# Altium PCB MainBoard.PcbDoc
Units mm, origin at the board's own origin, x right, y up, seen from the top; angles counter-clockwise.
Board outline 63.25 x 28.07 mm, 2 copper layers (Top Layer, Bottom Layer); 24 components, 30 nets, 104 pads, 0 vias.
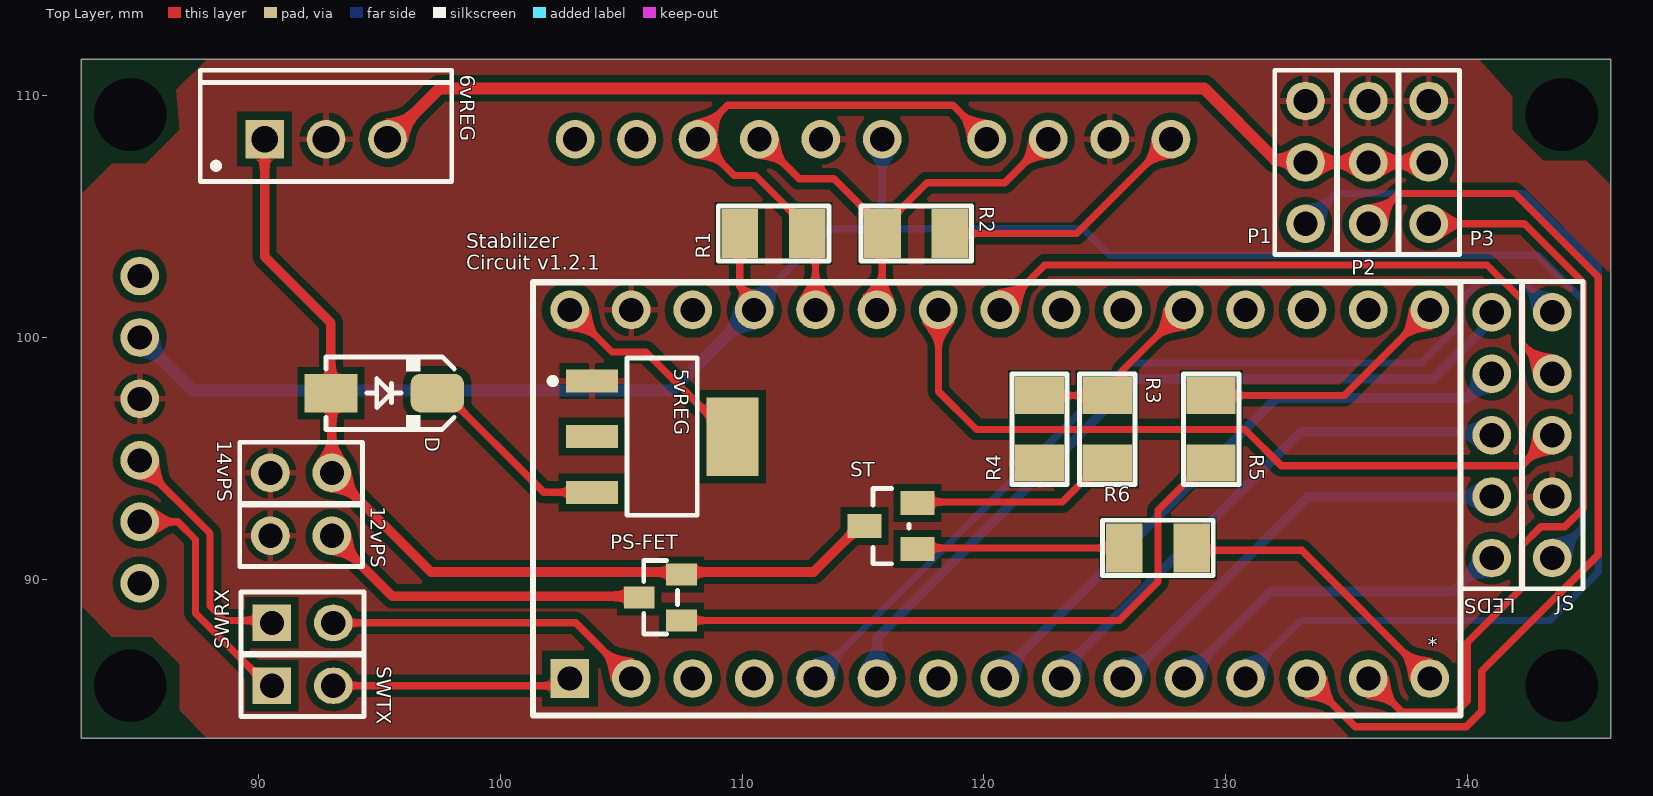
[diagram p0: Top Layer view]
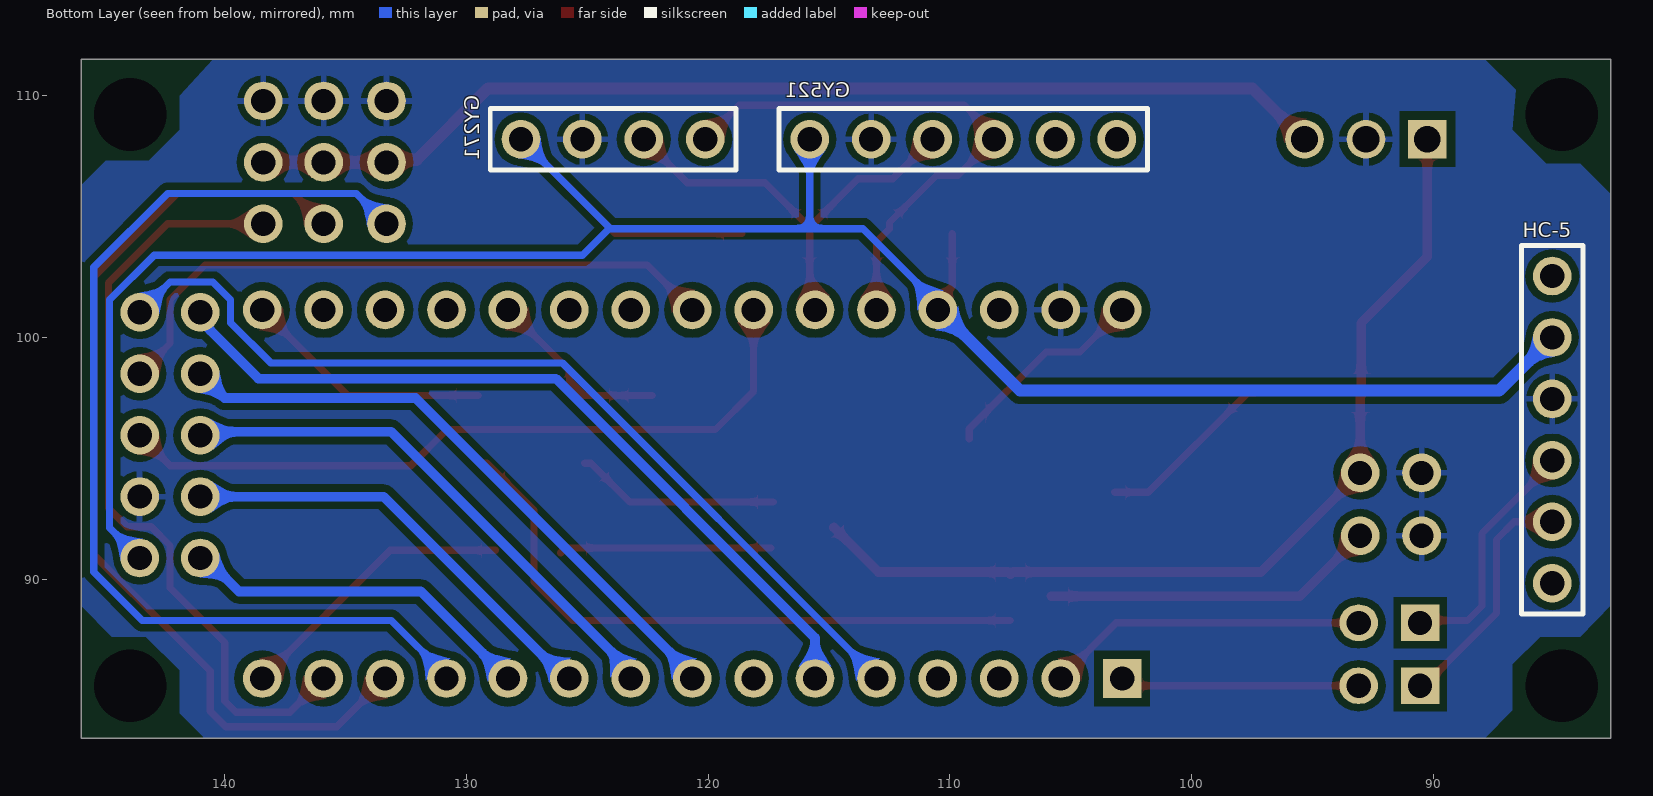
[diagram p1: Bottom Layer view, seen from below]

## Layer stack, top to bottom
Top Solder: solder mask 0.0102, Solder Resist, Dk 3.5
Top Layer: signal copper 0.0356
Dielectric 1: dielectric 0.32, FR-4, Dk 4.8
Bottom Layer: signal copper 0.0356
Bottom Solder: solder mask 0.0102, Solder Resist, Dk 3.5

## Board outline
82.677,83.439 145.923,83.439 145.923,111.506 82.677,111.506

## Design rules (kind name [scope] priority, off if disabled: settings)
Clearance [All] p1: gap=0.3 ignorepadtopadclearanceinfootprint=FALSE
ComponentClearance [All] p1: gap=0 collisioncheckmode=3 verticalgap=0 showdistances=FALSE
Height [All] p1: minheight=0 maxheight=50.4 prefheight=12.7
HoleSize [All] p1: absolutevalues=TRUE maxlimit=3 minlimit=0.025 maxpercent=80.000 minpercent=20.000
PolygonConnect [All] p1: connectstyle=Relief reliefconductorwidth=0.254 reliefentries=4 polygonreliefangle="90 Angle" airgapwidth=0.254
RoutingVias [All] p1: holewidth=0.711 width=1.27 viastyle="Through Hole" minholewidth=0.711 minwidth=1.27 maxholewidth=0.711 maxwidth=1.27
SilkToSilkClearance [All] p1: silktosilkclearance=0
SilkToSolderMaskClearance [IsPad] p1: minsilkscreentomaskgap=0 clearancetoexposedcopper=TRUE
SolderMaskExpansion [All] p1: expansion=0.125 istentingtop=FALSE
UnRoutedNet [All] p1: checkbadconnections=TRUE
Width [All] p1: maxlimit=0.8 minlimit=0.3 preferedwidth=0.3
24 further rules are at their usual default settings.

## Components (designator, comment, footprint, x,y, rotation, side; value= is the part's Value field where it differs from the comment)
5vREG "LM1117MPX-3.3-NOPB" Texas_Instruments_LM1117MPX-3.3-NOPB_0 106.7,95.9 r270 top value=SKIP
6vREG "L7806ABV" TO220 92.8,108.2 r0 top
12vPS "Header 2" HDR1X2#1 93.04,91.8 r180 top
14vPS "Header 2" HDR1X2#1 93.04,94.4 r180 top
* "arduinoNano" "ARDUINO NANO" 98.816,84.376 r0 top
D "1N4007" D_SMA 95.2,97.7 r0 top
GY271 "Header 4" HDR1X4 127.74,108.2 r180 bottom
GY521 "Header 6" HDR1X6 115.8,108.2 r180 bottom
HC-5 "Header 6" HDR1X6 85.1,89.84 r90 bottom
JS "Header 5" HDR1X5 143.5,101.04 r270 top
LEDS "Header 5" HDR1X5 141,90.88 r90 top
P1 "Header 3" HDR1X3 133.3,109.78 r270 top
P2 "Header 3" HDR1X3 135.9,109.78 r270 top
P3 "Header 3" HDR1X3 138.4,109.78 r270 top
PS-FET "SI2301BDS-T1-E3" VISHAY_SILICONIX_S-03946_MFG 106.636,89.253 r180 top
R1 "1.87k" SMD-1206-RES 111.303,104.3 r270 top
R2 "1.87k" SMD-1206-RES 117.203,104.3 r90 top
R3 "1.62M" SMD-1206-RES 125.1,96.2 r180 top value=1.62k
R4 "732k" SMD-1206-RES 122.3,96.2 r0 top
R5 "100" SMD-1206-RES 129.4,96.203 r0 top
R6 "100" SMD-1206-RES 127.2,91.3 r270 top
ST "MMBT5551" ON_Semi_318BM_0 116.162,92.202 r90 top value=SKIP
SWRX "Header 2" HDR1X2#2 90.56,88.2 r0 top
SWTX "Header 2" HDR1X2#2 90.56,85.6 r0 top

## Footprints (in the part's own frame and the unit in brackets; to place one, negate y for a bottom-side part, rotate by r counter-clockwise, add the part's x,y. Pads: shape width x height; smd on the part's side, far side on the other; paste and mask are expansions set on the pad)
"ARDUINO NANO" [mm] "arduino nano"
  rect 1.6x1.6 hole 1: 0(4.064,1.524)
  round 1.6 hole 1: 1(6.604,1.524) 2(9.144,1.524) 3(11.684,1.524) 4(14.224,1.524) 5(16.764,1.524) 6(19.304,1.524) 7(21.844,1.524) 8(24.384,1.524) 9(26.924,1.524) 10(29.464,1.524) 11(32.004,1.524) 12(34.544,1.524) 13(37.084,1.524) 14(39.624,1.524) 15(39.624,16.764) 16(37.084,16.764) 17(34.544,16.764) 18(32.004,16.764) 19(29.464,16.764) 20(26.924,16.764) 21(24.384,16.764) 22(21.844,16.764) 23(19.304,16.764) 24(16.764,16.764) 25(14.224,16.764) 26(11.684,16.764) 27(9.144,16.764) 28(6.604,16.764) 29(4.064,16.764)
  silkscreen extent 2.54,0 40.89,17.91
D_SMA [mm] "SMA Molded Diode, 2-Leads, Body 4.3x2.7mm, SOD-128"
  rect 2.2x1.6 smd: 1(-2.2,0)
  rrect50% 2.2x1.6 smd: 2(2.2,0)
  silkscreen extent -2.4,-1.5 2.9,1.5, body extent -2.75,-1.4 2.75,1.4, height 2.6
HDR1X2#1 [mm] "Connector; Header; 2 Position"
  round 1.6 hole 1: 1(0,0) 2(2.54,0)
  silkscreen extent -1.27,-1.27 3.81,1.27
HDR1X2#2 [mm] "Connector; Header; 2 Position"
  rect 1.6x1.5 hole 1: 1(0,0)
  oval 1.6x1.5 hole 1: 2(2.54,0)
  silkscreen extent -1.27,-1.27 3.81,1.27
HDR1X3 [mm] "Connector; Header; 3 Position"
  round 1.6 hole 1: 1(0,0) 2(2.54,0) 3(5.08,0)
  silkscreen extent -1.27,-1.27 6.35,1.27
HDR1X4 [mm] "Connector; Header; 4 Position"
  round 1.6 hole 1: 1(0,0) 2(2.54,0) 3(5.08,0) 4(7.62,0)
  silkscreen extent -1.27,-1.27 8.89,1.27
HDR1X5 [mm] "Connector; Header; 5 Position"
  round 1.6 hole 1: 1(0,0) 2(2.54,0) 3(5.08,0) 4(7.62,0) 5(10.16,0)
  silkscreen extent -1.27,-1.27 11.43,1.27
HDR1X6 [mm] "Connector; Header; 6 Position"
  round 1.6 hole 1: 1(0,0) 2(2.54,0) 3(5.08,0) 4(7.62,0) 5(10.16,0) 6(12.7,0)
  silkscreen extent -1.27,-1.27 13.97,1.27
ON_Semi_318BM_0 [mm]
  rect 1x1.4 smd paste+0 mask+0: 1(-0.95,-1.1) 2(0.95,-1.1) 3(0,1.1)
  silkscreen extent -1.56,-0.75 1.56,0.75, body extent -1.66,-1.9 1.66,1.9, height 0.25
SMD-1206-RES [mil]
  rect 80x60 smd: 1(0,55) 2(0,-55)
  silkscreen extent -45,-90 45,90, body extent -34,-66 34,66, height 33
Texas_Instruments_LM1117MPX-3.3-NOPB_0 [mm]
  rect 0.95x2.15 smd paste+0 mask+0: 1(-2.3,-2.9) 2(0,-2.9) 3(2.3,-2.9)
  rect 3.25x2.15 smd paste+0 mask+0: 4(0,2.9)
  silkscreen extent -3.25,-4.65 3.25,1.45, body extent -3.45,-4.08 3.45,4.08, height 0.25
TO220 [mm] "TO, Thru-Hole, Vertical, Heatsink Mounted; 3 In-Line Leads; Pitch 2.54 mm"
  rect 1.6x1.6 hole 1.1: 1(-2.54,0)
  round 1.6 hole 1.1: 2(0,0) 3(2.54,0)
  silkscreen extent -5.2,-1.75 5.2,2.85, body extent -5.25,-1.8 5.25,2.9, height 19.7
VISHAY_SILICONIX_S-03946_MFG [mil]
  rect 50x36 smd paste+0 mask+0: 1(-34,37.5) 2(-34,-37.5) 3(35,0)
  silkscreen extent -28,-60 28,60, body extent -65,-64 65,64, height 10

## Part data
5vREG: library part LM1117MPX-3.3/NOPB, "IC REG LINEAR 3.3V 800MA SOT223", Capacitance=SKIP, Digikey Part Number=LM1117MPX-3.3/NOPBCT-ND, Manufacturer="Texas Instruments", Mouser Part Number=926-LM1117MPX3.3NOPB, Package=SOT-223, Temperature="0°C to +125°C", Temperature Range High=+125°C, Temperature Range Low=0°C, ComponentLink1Description=Upverter, ComponentLink1URL=https://upverter.com/upn/revision/cd27f63952c6b59d/, ComponentLink2Description=Datasheet, ComponentLink2URL=http://www.ti.com/lit/ds/symlink/lm1117.pdf, Datasheet Path=datasheets/IC_Texas_Instruments_LM1117MPX-3.3-NOPB_eec.pdf, Datasheet Path1=datasheets/IC_Texas_Instruments_LM1117MPX-3.3-NOPB_eec.pdf, Digikey Description="IC REG LINEAR 3.3V 800MA SOT223", helpURL=https://upverter.com/upn/revision/cd27f63952c6b59d/, Inductance=SKIP, Lead Free=yes, Library Path1=parts/IC_Texas_Instruments_LM1117MPX-3.3-NOPB_eec.SchLib, Library Ref1=LM1117MPX-3.3-NOPB, Part Number=LM1117MPX-3.3/NOPB, Price=0.703616332073, Resistance=SKIP, RoHS=TRUE, Supplier 1=Digi-Key, Supplier 2=Mouser, Supplier Part Number 1=LM1117MPX-3.3/NOPBCT-ND, Supplier Part Number 2=926-LM1117MPX3.3NOPB, Voltage=SKIP
6vREG: "Positive Voltage Regulator, 6V, 3-Pin TO-220", ComponentLink1Description="Manufacturer URL", ComponentLink1URL=http://www.st.com, ComponentLink2Description=Datasheet, ComponentLink2URL=http://www.st.com/internet/com/TECHNICAL_RESOURCES/TECHNICAL_LITERATURE/DATASHEET/CD00000444.pdf, ComponentLink3Description="Package Specification", ComponentLink3URL=http://www.st.com/internet/com/TECHNICAL_RESOURCES/TECHNICAL_LITERATURE/PACKAGE_INFORMATION/CD00004649.pdf, DatasheetVersion=16/11/2011, PackageDescription="TO, Thru-Hole, Vertical, Heatsink Mounted; 3 In-Line Leads; Pitch 2.54 mm", PackageReference=TO220, PackageVersion=ver3.0, PartNumber=L7806ABV
12vPS 14vPS SWRX SWTX: "Header, 2-Pin", LatestRevisionDate=17-Jul-2002, LatestRevisionNote="Re-released for DXP Platform.", Publisher="Altium Limited"
D: library part DIODE_SMD_1N4007, "DIODE, GENERAL PURPOSE, 1000V/1A", ASSEMBLY=ASSEMBLY, DESC=DESCRIPTION, MANF=Kingtronics, MANF_P#=M7, PARAM="1000V VRRM", PARAM2=1A, Price=PRICE
GY271: "Header, 4-Pin", LatestRevisionDate=17-Jul-2002, LatestRevisionNote="Re-released for DXP Platform.", Publisher="Altium Limited"
GY521 HC-5: "Header, 6-Pin", LatestRevisionDate=17-Jul-2002, LatestRevisionNote="Re-released for DXP Platform.", Publisher="Altium Limited"
JS LEDS: "Header, 5-Pin", LatestRevisionDate=17-Jul-2002, LatestRevisionNote="Re-released for DXP Platform.", Publisher="Altium Limited"
P1 P2 P3: "Header, 3-Pin", LatestRevisionDate=17-Jul-2002, LatestRevisionNote="Re-released for DXP Platform.", Publisher="Altium Limited"
PS-FET: "TRANS MOSFET P-CH 20V 2.2A SOT23-3", Continuous Drain Current=-2.2A, Digikey Part Number=SI2301BDS-T1-E3CT-ND, Drain To Source Breakdown Voltage=-20V, Drain To Source Resistance=0.08Ω, Gate To Source Voltage=8V, Input Capacitace At Vds="375pF @ -6V", Manufacturer="Vishay Siliconix", Max Forward Diode Voltage=-1.2V, Max Junction Temp=+150°C, Mouser Part Number=781-SI2301BDS-E3, Package=S-03946, Power Dissipation=0.7W, Pulse Drain Current=-10A, Temperature="-55°C to +150°C", Temperature Range Low=-55°C, Typ Forward Diode Voltage=-0.8V, Automotive=No, ComponentLink1Description=Upverter, ComponentLink1URL=https://upverter.com/part/id/8ed443e4ece09bfe/, ComponentLink2Description=Datasheet, ComponentLink2URL=http://www.vishay.com/doc?72066, Datasheet Path=datasheets/Trans_Vishay_Siliconix_SI2301BDS-T1-E3_eec.pdf, Depletion Mode=False, Digikey Description="TRANS MOSFET P-CH 20V 2.2A SOT23-3", Drain To Source Voltage=-20V, Gate Charge At Vgs="4.5nC @ -4.5V", Height=1.12mm, helpURL=https://upverter.com/part/id/8ed443e4ece09bfe/, Ipc Land Pattern Name=SOT95P237X100-3, Lead Free=Yes, Mouser Description="MOSFET 20V 2.0A 0.9W", Number Of Channels=1, Number Of P Channels=1, Part Number=SI2301BDS-T1-E3, RoHS=TRUE, Rthja Max=140°C/W, Standoff Height=0.01mm, Supplier 1=Digi-Key, Supplier 2=Mouser, Supplier Part Number 1=SI2301BDS-T1-E3CT-ND, Supplier Part Number 2=781-SI2301BDS-E3, Temperature Range High=+150°C, Threshold Vgs Max=-0.95V, Threshold Vgs Min=-0.45V, Transconductance=6.5S, Turn Off Delay Time=30ns, Turn On Delay Time=20ns, Verification Version=0.0.0.3
R1 R2: library part ERJ-8ENF1871V, "RES SMD 1.87K OHM 1% 1/4W 1206", Digi-Key Part Number=P1.87KFCT-ND, Manufacturer="Panasonic Electronic Components", Operating Temperature="-55°C ~ 155°C", Package / Case="1206 (3216 Metric)", Power (Watts)="0.25W, 1/4W", Supplier Device Package=1206, Temperature Coefficient=±100ppm/°C, Tolerance=±1%, @ qty=1500, Composition="Thick Film", Datasheets=http://industrial.panasonic.com/www-cgi/jvcr13pz.cgi?E+PZ+3+AOA0002+ERJ8ENF1871V+7+WW, Factory Stock=0, Failure Rate=-, Features="Automotive AEC-Q200", Height - Seated (Max)="0.028\" (0.70mm)", Image=//media.digikey.com/Renders/Panasonic%20Renders/ERJ-1206%20Pkg.jpg, Minimum Quantity=1, Number of Terminations=2, Packaging="Cut Tape (CT)", Part Number=ERJ-8ENF1871V, Part Status=Active, Quantity Available=51643, Series=ERJ, Size / Dimension="0.126\" L x 0.063\" W (3.20mm x 1.60mm)", Unit Price (USD)=0.00933
R3: library part ERJ-8ENF1621V, "RES SMD 1.62K OHM 1% 1/4W 1206", Digi-Key Part Number=P1.62KFCT-ND, Manufacturer="Panasonic Electronic Components", Operating Temperature="-55°C ~ 155°C", Package / Case="1206 (3216 Metric)", Power (Watts)="0.25W, 1/4W", Supplier Device Package=1206, Temperature Coefficient=±100ppm/°C, Tolerance=±1%, @ qty=1500, Composition="Thick Film", Datasheets=http://industrial.panasonic.com/www-cgi/jvcr13pz.cgi?E+PZ+3+AOA0002+ERJ8ENF1621V+7+WW, Factory Stock=0, Failure Rate=-, Features="Automotive AEC-Q200", Height - Seated (Max)="0.028\" (0.70mm)", Image=//media.digikey.com/Renders/Panasonic%20Renders/ERJ-1206%20Pkg.jpg, Minimum Quantity=1, Number of Terminations=2, Packaging="Cut Tape (CT)", Part Number=ERJ-8ENF1621V, Part Status=Active, Quantity Available=55499, Series=ERJ, Size / Dimension="0.126\" L x 0.063\" W (3.20mm x 1.60mm)", Unit Price (USD)=0.00933
R4: library part ERJ-8ENF7323V, "RES SMD 732K OHM 1% 1/4W 1206", Digi-Key Part Number=P732KFCT-ND, Manufacturer="Panasonic Electronic Components", Operating Temperature="-55°C ~ 155°C", Package / Case="1206 (3216 Metric)", Power (Watts)="0.25W, 1/4W", Supplier Device Package=1206, Temperature Coefficient=±100ppm/°C, Tolerance=±1%, @ qty=1500, Composition="Thick Film", Datasheets=http://industrial.panasonic.com/www-cgi/jvcr13pz.cgi?E+PZ+3+AOA0002+ERJ8ENF7323V+7+WW, Factory Stock=0, Failure Rate=-, Features="Automotive AEC-Q200", Height - Seated (Max)="0.028\" (0.70mm)", Image=//media.digikey.com/Renders/Panasonic%20Renders/ERJ-1206%20Pkg.jpg, Minimum Quantity=1, Number of Terminations=2, Packaging="Cut Tape (CT)", Part Number=ERJ-8ENF7323V, Part Status=Active, Quantity Available=40849, Series=ERJ, Size / Dimension="0.126\" L x 0.063\" W (3.20mm x 1.60mm)", Unit Price (USD)=0.00933
R5 R6: library part ERJ-8ENF1000V, "RES SMD 100 OHM 1% 1/4W 1206", Digi-Key Part Number=P100FCT-ND, Manufacturer="Panasonic Electronic Components", Operating Temperature="-55°C ~ 155°C", Package / Case="1206 (3216 Metric)", Power (Watts)="0.25W, 1/4W", Supplier Device Package=1206, Temperature Coefficient=±100ppm/°C, Tolerance=±1%, @ qty=1500, Composition="Thick Film", Datasheets=http://industrial.panasonic.com/www-cgi/jvcr13pz.cgi?E+PZ+3+AOA0002+ERJ8ENF1000V+7+WW, Factory Stock=0, Failure Rate=-, Features="Automotive AEC-Q200", Height - Seated (Max)="0.028\" (0.70mm)", Image=//media.digikey.com/Renders/Panasonic%20Renders/ERJ-1206%20Pkg.jpg, Minimum Quantity=1, Number of Terminations=2, Packaging="Cut Tape (CT)", Part Number=ERJ-8ENF1000V, Part Status=Active, Quantity Available=384173, Series=ERJ, Size / Dimension="0.126\" L x 0.063\" W (3.20mm x 1.60mm)", Unit Price (USD)=0.00933
ST: "TRANS NPN 160V 0.6A SOT-23", Capacitance=SKIP, Collector Base Voltage=180V, Collector Emitter Breakdown Voltage=160V, Collector Emitter Saturation Voltage=0.2V, Digikey Part Number=MMBT5551FSCT-ND, Emitter Base Voltage=6V, Manufacturer="ON Semi", Max Collector Current=600mA, Max Junction Temp=+150°C, Mouser Part Number=512-MMBT5551, Package=318BM, Power Dissipation=350mW, Temperature=to, Collector Emitter Voltage=160V, ComponentLink1Description=Upverter, ComponentLink1URL=https://upverter.com/upn/revision/1e093772ae9a7220/, ComponentLink2Description=Datasheet, ComponentLink2URL=http://www.onsemi.com/pub/Collateral/2N5551-D.pdf, Datasheet Path=datasheets/Trans_ON_Semi_MMBT5551_eec.pdf, Datasheet Path1=datasheets/Trans_ON_Semi_MMBT5551_eec.pdf, Digikey Description="TRANS NPN 160V 0.6A SOT-23", Footprint Url=http://www.onsemi.com/pub/Collateral/318BM.PDF, Gain Bandwidth Product=100MHz, Height=1.2mm, helpURL=https://upverter.com/upn/revision/1e093772ae9a7220/, Hfe Min=80, Inductance=SKIP, Lead Free=yes, Library Path1=parts/Trans_ON_Semi_MMBT5551_eec.SchLib, Library Ref1=MMBT5551, Number Of Elements=1, Number Of Npn=1, Number Of Pnp=0, Part Number=MMBT5551, Price=SKIP, Resistance=SKIP, RoHS=TRUE, Standoff Height=0mm, Supplier 1=Digi-Key, Supplier 2=Mouser, Supplier Part Number 1=MMBT5551FSCT-ND, Supplier Part Number 2=512-MMBT5551, Verification Version=0.0.0.1, Voltage=SKIP

## Free pads (board coordinates)
  round 0 hole 3: 7(143.891,85.598) 8(143.891,109.22) 9(84.709,109.22) 10(84.709,85.598)

## Nets (pads, with @x,y where several pads share a name; then routed paths per layer and width w, separated by ;. In a path a pad name is that pad's centre, name@x,y a point inside that pad or via, vN(x,y) a via of type N, cw(c..) or ccw(c..) an arc to the next point about the centre after c; other vN are vias at no path point)
GND: 5vREG.1 6vREG.2 12vPS.2 14vPS.2 *.28 GY271.2 GY521.2 HC-5.4 JS.4 P1.1 P2.1 P3.1 R4.2
Net5vREG_3: 5vREG.3 D.2 | length 7.5
  Top Layer w0.3: D.2 97.7,97.7 101.8,93.6 5vREG.3@103.2,93.6
Net5vReg_4: 5vREG.4 *.29 | length 8.8
  Top Layer w0.3: *.29 104.62,99.4 106.024,99.4 109.2,96.224 5vREG.4@109.2,95.8
Net6vREG_1: 6vREG.1 14vPS.1 D.1 PS-FET.2 ST.3 | length 39.3
  Top Layer w0.4: 6vREG.1 90.26,103.34 93,100.6 D.1@93,97.6 ; D.1 93.04,97.66 93.04,94.56 14vPS.1@93.1,94.5 ; 14vPS.1 97.14,90.3 107.405,90.3 PS-FET.2 107.595,90.3 112.96,90.3 ST.3@114.8,92.14
Net6vREG_3: 6vREG.3 P1.2 P2.2 P3.2 | length 45.1
  Top Layer w0.5: 6vREG.3 95.4,108.2 97.5,110.3 129.1,110.3 132.05,107.35 133.15,107.35 P1.2@133.2,107.3 ; P1.2@133.2,107.2 133.24,107.24 P1.2 P2.2 ; P2.2@136,107.2 136.04,107.24 P3.2
Net12vPS_1: 12vPS.1 PS-FET.3 | length 13.8
  Top Layer w0.4: 12vPS.1 95.54,89.3 PS-FET.3@105.8,89.3
Net*_0: *.0 SWTX.2 | length 10.1
  Top Layer w0.3: SWTX.2 102.6,85.6 *.0@103,86
Net*_1: *.1 SWRX.2 | length 13.3
  Top Layer w0.3: SWRX.2 103.12,88.2 105.32,86 *.1@105.5,86
Net*_4: *.4 JS.1 | length 38.4
  Bottom Layer w0.3: *.4 113.04,85.959 126.031,98.95 138.088,98.95 139.75,100.612 139.75,101.558 140.482,102.29 142.25,102.29 JS.1
Net*_5: *.5 LEDS.5 | length 32.9
  Bottom Layer w0.4: *.5 115.58,87.58 126.3,98.3 138.6,98.3 140.58,100.28 140.58,100.295 141,100.715 LEDS.5
Net*_7: *.7 LEDS.4 | length 25.7
  Bottom Layer w0.4: *.7 120.66,86.06 132.1,97.5 140,97.5 LEDS.4
Net*_8: *.8 LEDS.3 | length 22.3
  Bottom Layer w0.4: *.8 123.2,86.197 124.034,87.031 133.103,96.1 140.86,96.1 LEDS.3
Net*_9: *.9 LEDS.2 | length 18.4
  Bottom Layer w0.4: *.9 125.9,85.9 133.42,93.42 LEDS.2
Net*_10: *.10 LEDS.1 | length 14.7
  Bottom Layer w0.4: *.10 131.88,89.5 139.4,89.5 LEDS.1@140.9,91
Net*_11: *.11 P1.3 | length 43
  Bottom Layer w0.3: *.11 130.82,86.02 133.1,88.3 143.4,88.3 145.4,90.3 145.4,102.9 142.35,105.95 134.55,105.95 P1.3
Net*_12: *.12 P2.3 | length 39.7
  Top Layer w0.3: *.12 135.36,83.9 139.949,83.9 140.589,84.541 140.589,86.211 143.778,89.4 143.788,89.4 145.4,91.012 145.4,102.5 141.95,105.95 137.15,105.95 P2.3
Net*_13: *.13 P3.3 | length 32.1
  Top Layer w0.3: *.13 137.3,84.5 139.524,84.5 139.989,84.965 139.989,87.389 142.25,89.65 142.25,91.398 143.022,92.17 144.018,92.17 144.8,92.952 144.8,102.251 142.351,104.7 P3.3
Net*_14: *.14 R6.1 | length 12.2
  Top Layer w0.3: R6.1@128.8,91.2 133.14,91.2 *.14 *.14@138.44,86.279
Net*_15: *.15 R5.1 | length 10.4
  Top Layer w0.3: R5.1@129.5,97.6 134.9,97.6 *.15
Net*_19: *.19 R3.2 R4.1 | length 7.6
  Top Layer w0.3: R4.1 R3.2@124.997,97.597 ; R3.2 125.121,97.597 125.733,98.209 125.733,98.633 128.24,101.14 *.19
Net*_22: *.22 JS.2 | length 26.4
  Top Layer w0.3: *.22 122.52,103 140.808,103 142.25,101.558 142.25,99.75 143.3,98.7 JS.2@143.3,98.6
Net*_23: *.23 JS.3 | length 30.5
  Top Layer w0.3: *.23 118.12,97.78 119.7,96.2 130.8,96.2 132.3,94.7 142.24,94.7 JS.3
NetPS-FET_1: PS-FET.1 R5.2 | length 26.3
  Top Layer w0.3: PS-FET.1 125.6,88.3 127.2,89.9 127.2,92.86 129.146,94.806 R5.2
NetR3_1: R3.1 ST.2 | length 8.5
  Top Layer w0.3: ST.2@117.3,93.2 123.243,93.2 124.846,94.803 R3.1
NetR6_2: R6.2 ST.1 | length 8.8
  Top Layer w0.3: ST.1@117.4,91.3 125.9,91.3 R6.2@126.1,91.1
RXD: HC-5.2 SWTX.1 | length 10.1
  Top Layer w0.3: HC-5.2 86.671,92.38 87.4,91.651 87.4,88.6 89.8,86.2 89.96,86.2 SWTX.1
scl: *.24 GY271.3 GY521.3 R2.1 | length 18.1
  Top Layer w0.3: GY521.3 112.361,106.559 113.801,106.559 115.76,104.6 R2.1@115.8,104.6 ; *.24@115.5,101.3 115.8,101.6 115.8,104.294 R2.1 ; R2.1@115.7,104.7 115.952,104.7 117.652,106.4 120.86,106.4 GY271.3
sda: *.25 GY271.4 GY521.4 R1.1 | length 22.8
  Top Layer w0.3: GY521.4@108.19,108.19 109.68,106.7 110.554,106.7 112.5,104.754 112.5,104.5 113.04,103.96 *.25 ; GY521.4@108.2,108.2 108.2,108.4 109.4,109.6 118.72,109.6 GY271.4
TXD: HC-5.3 SWRX.1 | length 10.2
  Top Layer w0.3: HC-5.3 85.1,94.8 88,91.9 88,88.9 88.6,88.3 SWRX.1@90.7,88.3
VCC: *.26 GY271.1 GY521.1 HC-5.5 JS.5 R1.2 R2.2 | length 98.4
  Top Layer w0.3: R1.2 109.906,102.113 110.5,101.519 *.26@110.5,101.3 ; R2.2 123.84,104.3 127.5,107.96 GY271.1@127.5,108.2
  Bottom Layer w0.3: *.26 110.5,101.4 113.6,104.5 115.8,104.5 ; GY521.1 115.8,104.5 ; 124.1,104.5 125.2,103.4 142.908,103.4 144.75,101.558 144.75,92.13 JS.5 ; GY271.1 124.04,104.5 115.8,104.5
  Bottom Layer w0.5: HC-5.5 87.3,97.8 107.1,97.8 110.2,100.9 *.26@110.2,101
pads on no net: 5vREG.2 *.2 *.3 *.6 *.16 *.17 *.18 *.20 *.21 *.27 GY521.5 GY521.6 HC-5.1 HC-5.6

## Polygon pours and split planes (outlines as drawn)
GND on Top Layer "GND_L01_P006" (solid, remove dead copper, pour order 6): 82.677,111.506 82.677,83.439 145.288,83.439 145.923,84.074 145.923,111.506
GND on Bottom Layer "GND_L02_P003" (solid, remove dead copper, pour order 3): 82.677,111.506 145.923,111.506 145.923,83.439 82.677,83.439

## Other copper
Top Layer:
  pour cut-out: 145.923,107.315 145.923,106.299 144.907,107.315 143.129,107.315 141.859,108.585 141.859,109.982 140.462,111.506 141.478,111.506 145.923,111.506
  pour cut-out: 82.677,88.138 82.677,88.9 83.947,87.63 85.598,87.63 86.741,86.487 86.741,84.582 87.884,83.439 86.995,83.439 82.677,83.439
  pour cut-out: 141.732,83.439 140.843,83.439 141.859,84.455 141.859,86.233 143.256,87.63 144.653,87.63 145.923,88.9 145.923,88.011 145.923,83.439
  pour cut-out: 87.122,111.506 87.884,111.506 86.614,110.236 86.741,108.585 85.344,107.188 83.947,107.188 82.677,105.918 82.677,107.315 82.677,111.506
Bottom Layer:
  pour cut-out: 82.677,88.011 82.677,88.932 83.947,87.63 85.598,87.63 86.741,86.487 86.741,84.582 87.884,83.439 87.249,83.439 82.677,83.439
  pour cut-out: 142.113,83.439 140.843,83.439 141.859,84.455 141.859,86.233 143.256,87.63 144.653,87.63 145.923,88.9 145.923,88.011 145.923,83.439
  pour cut-out: 87.058,111.506 87.884,111.506 86.614,110.236 86.741,108.585 85.344,107.188 83.947,107.188 82.677,105.918 82.677,111.506
  pour cut-out: 145.923,107.95 145.923,106.299 144.907,107.315 143.129,107.315 141.859,108.585 141.859,109.988 140.462,111.506 142.113,111.506 145.923,111.506

## Silkscreen, mask and mechanical layers (free items; w line width, h text height)
Top Overlay:
  text "Stabilizer / Circuit v1.2.1" at 98.6,102.8 h0.6
Drill Drawing:
  lines w2.032: 81.661,83.439 ccw(c82.677,83.439) 82.677,82.423 ; 81.661,83.439 ccw(c82.677,83.439) 82.677,82.423 ; 81.661,83.439 81.661,111.506 ; 81.661,111.506 cw(c82.677,111.506) 82.677,112.522 ; 81.661,111.506 cw(c82.677,111.506) 82.677,112.522 ; 82.677,82.423 145.923,82.423 ; 82.677,112.522 145.923,112.522 ; 145.923,82.423 ccw(c145.923,83.439) 146.939,83.439 ; 145.923,82.423 ccw(c145.923,83.439) 146.939,83.439 ; 145.923,112.522 cw(c145.923,111.506) 146.939,111.506 ; 145.923,112.522 cw(c145.923,111.506) 146.939,111.506 ; 146.939,83.439 146.939,111.506

## Dimensions
84.709,109.22 to 143.891,109.22 on Top Paste
84.709,109.22 to 84.709,85.598 on Top Paste
82.677,111.506 to 145.923,111.506 on Top Paste
82.677,111.506 to 82.677,83.439 on Top Paste